# Altium PCB Gecko3Power.PCBDOC
Units mm, origin at the board's own origin, x right, y up, seen from the top; angles counter-clockwise.
Board outline 83.5 x 52 mm, 4 copper layers (Top Layer, MidLayer1, MidLayer2, Bottom Layer); 111 components, 73 nets, 456 pads, 142 vias.
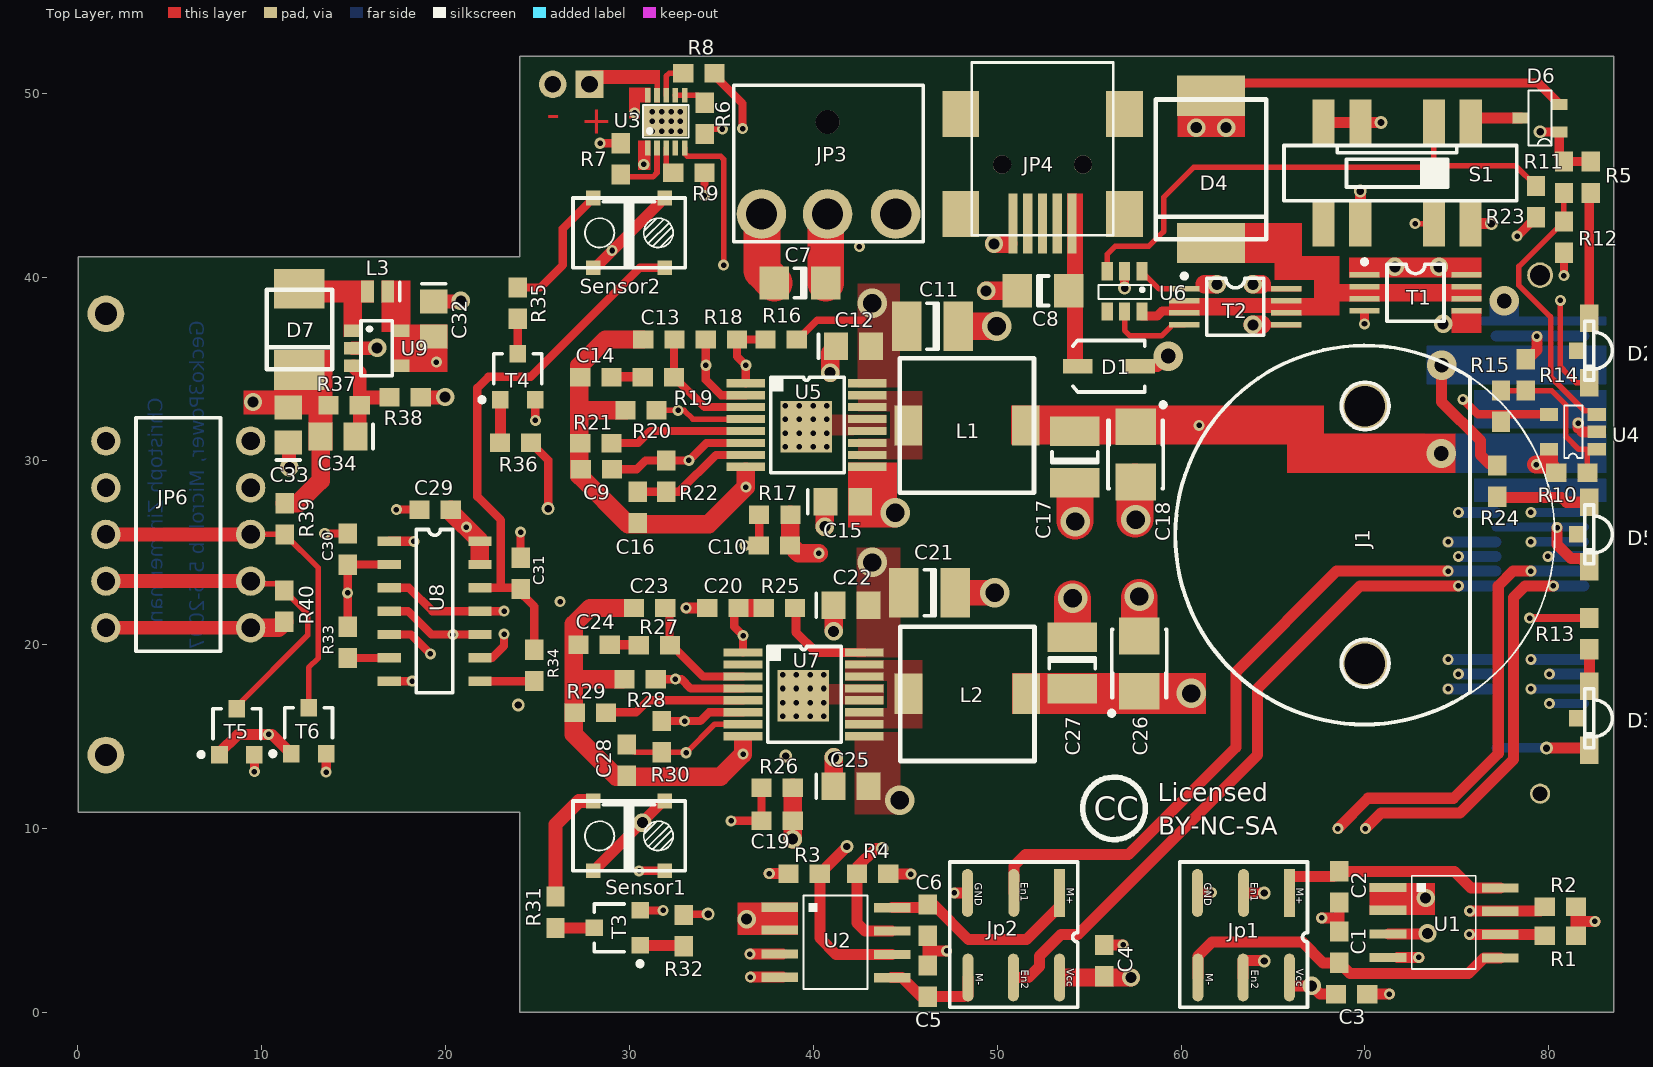
[diagram p0: Top Layer view]
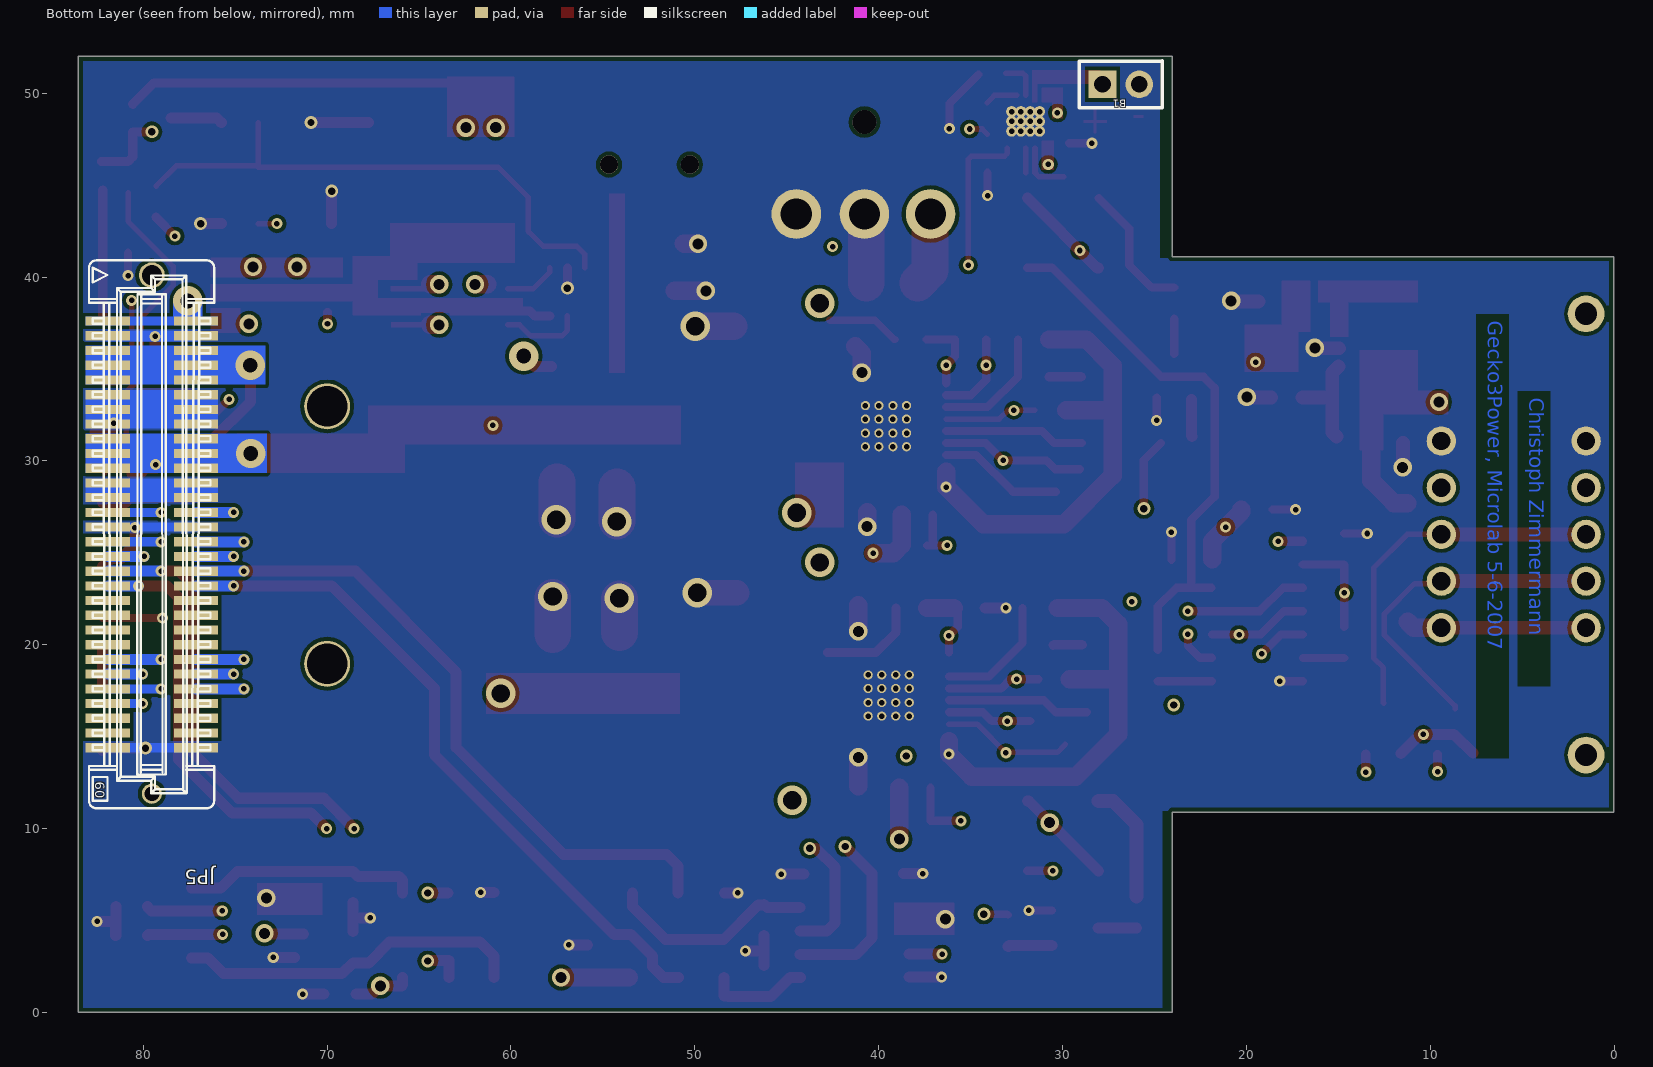
[diagram p1: Bottom Layer view, seen from below]
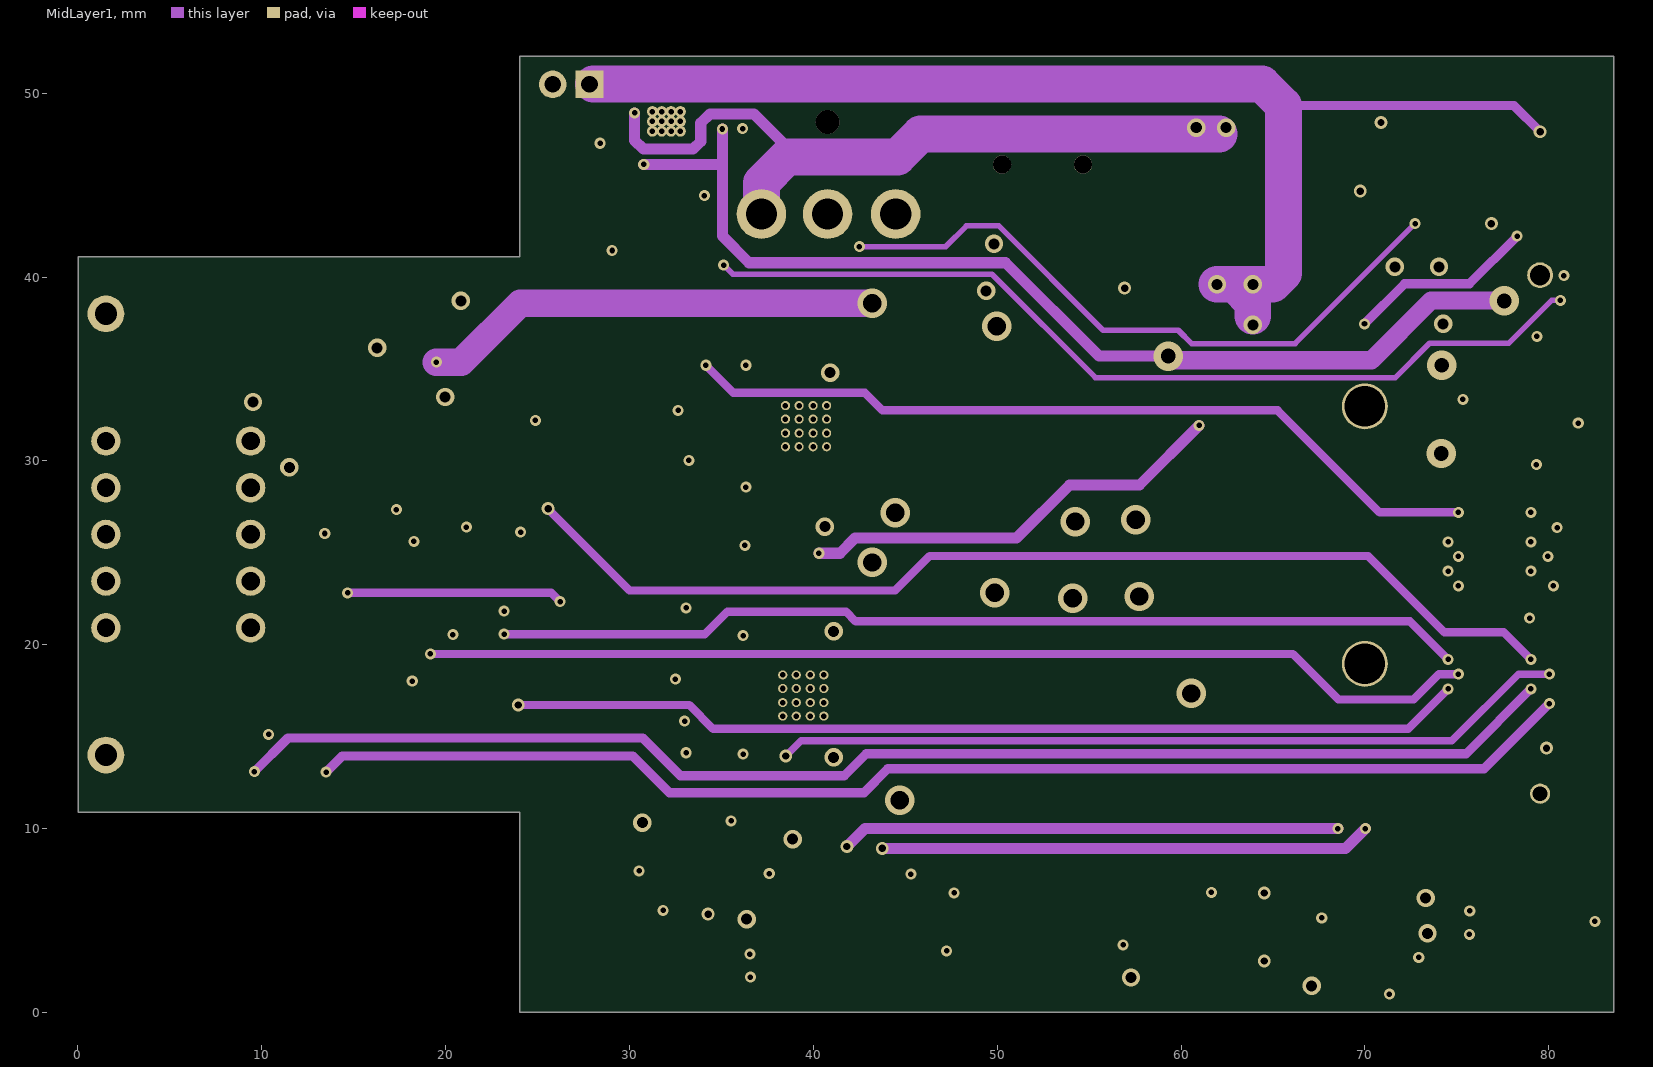
[diagram p2: MidLayer1]
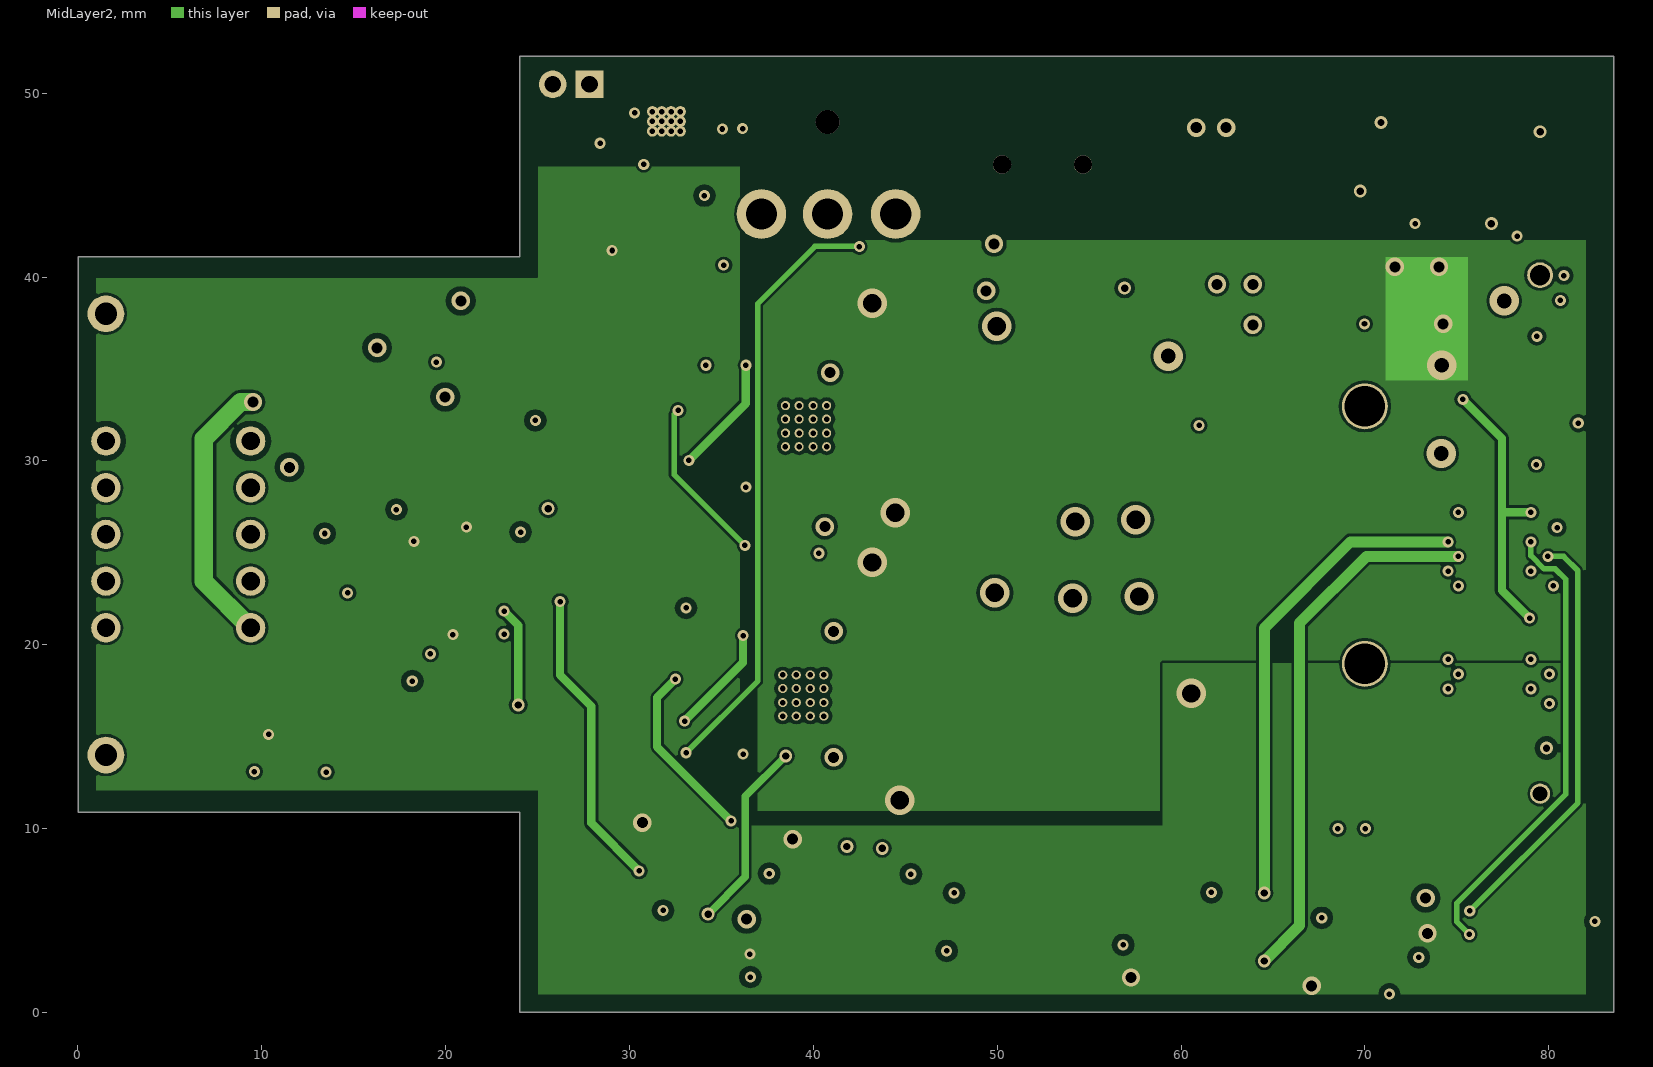
[diagram p3: MidLayer2]

## Layer stack, top to bottom
Top Layer: signal copper 0.0356
Dielectric: core 0.32, FR-4, Dk 4.8
MidLayer1: signal copper 0.0356
Dielectric: prepreg 0.32, FR-4, Dk 4.8
MidLayer2: signal copper 0.0356
Dielectric: core 0.32, FR-4, Dk 4.8
Bottom Layer: signal copper 0.0356

## Board outline
0.025,10.9 0.025,41.1 24.025,41.1 24.025,52 83.525,52 83.525,0 24.025,0 24.025,10.9

## Design rules (kind name [scope] priority, off if disabled: settings)
Clearance Clearance_1 [InNet('GND') vs Not(InNet('GND'))] p1: gap=0.2
Clearance [All] p2: gap=0.15
ComponentClearance BottomComponentClearance [OnLayer('Bottom Layer') vs OnLayer('Bottom Layer')] p1: gap=0.254 collisioncheckmode=3 verticalgap=0.254
ComponentClearance TopComponentClearance [OnLayer('Top Layer') vs OnLayer('Top Layer')] p2: gap=0.254 collisioncheckmode=0 verticalgap=0.254
HoleSize [All] p1: absolutevalues=TRUE maxlimit=2.54 minlimit=0.3 maxpercent=80.000 minpercent=20.000
PasteMaskExpansion [All] p1: expansion=-0.05
PlaneClearance [All] p1: clearance=1
PlaneConnect [All] p1: planeconnectstyle=Direct reliefexpansion=0.508 reliefentries=4 reliefconductorwidth=0.254 reliefairgap=0.254
PolygonConnect [All] p1: connectstyle=Direct reliefconductorwidth=0.2 reliefentries=4 polygonreliefangle="90 Angle"
RoomDefinition 2_Wheels_H_Bridge [InComponentClass('2_Wheels_H_Bridge')] p1: confinementstyle=ConfineIn formatcopy=TRUE lockcomponents=FALSE outline 36.805,-0.07 82.405,-0.07 82.405,8.605 36.805,8.605
RoomDefinition Battery_Charger [InComponentClass('Battery_Charger')] p2: confinementstyle=ConfineIn formatcopy=TRUE lockcomponents=FALSE outline 24.305,13.13 98.08,13.13 98.08,52.205 24.305,52.205
RoomDefinition Power_Supply [InComponentClass('Power_Supply')] p3: confinementstyle=ConfineIn formatcopy=TRUE lockcomponents=FALSE outline 26.305,9.555 125.83,9.555 125.83,66.88 26.305,66.88
RoomDefinition Gecko3Power [InComponentClass('Gecko3Power')] p4 off: confinementstyle=ConfineIn formatcopy=TRUE lockcomponents=FALSE outline -6.575,-6.15 94.825,-6.15 94.825,63.1 -6.575,63.1
RoomDefinition Ultrasonic [InComponentClass('Ultrasonic')] p5 off: confinementstyle=ConfineIn formatcopy=TRUE lockcomponents=FALSE outline -4.2,-5.125 28.225,-5.125 28.225,61.801 -4.2,61.801
RoomDefinition Sigma_Delta [InComponentClass('Sigma_Delta')] p6 off: confinementstyle=ConfineIn formatcopy=TRUE lockcomponents=FALSE outline 9.525,-1.7 35.975,-1.7 35.975,46.6 9.525,46.6
RoutingCorners [All] p1: cornerstyle=Round minsetback=2.54 maxsetback=2.54
RoutingLayers [All] p1: top layer_v5=TRUE mid layer 1_v5=FALSE mid layer 2_v5=FALSE bottom layer_v5=TRUE
RoutingVias [All] p1: holewidth=0.3 width=0.6 viastyle="Through Hole" minholewidth=0.3 minwidth=0.6 maxholewidth=1 maxwidth=2
SolderMaskExpansion [All] p1: expansion=0.05
TestPointUsage [All] p1: valid=0 allowmultiple=FALSE
Testpoint [All] p1: side=15 testpointundercomponent=TRUE minsize=1.016 maxsize=2.54 preferedsize=1.524 minholesize=0 maxholesize=1.016 preferedholesize=0.813 testpointgrid=0.025 style=1023 order=0123456789
Width [All] p1: maxlimit=10 minlimit=0.15 preferedwidth=0.6
12 further rules are at their usual default settings.

## Classes and differential pairs
component class Battery_Charger: B1 C7 C8 D1 D2 D3 JP3 JP4 R5 R6 R7 R8 R9 R10 R11 R12 R13 R14 R15 U3 U4
component class Gecko3Power: J1 JP5
component class 2_Wheels_H_Bridge: C1 C2 C3 C4 C5 C6 Jp1 Jp2 R1 R2 R3 R4 U1 U2
component class Power_Supply: C9 C10 C11 C12 C13 C14 C15 C16 C17 C18 C19 C20 C21 C22 C23 C24 C25 C26 C27 C28 D4 D5 D6 L1 L2 R16 R17 R18 R19 R20 R21 R22 R23 R24 R25 R26 R27 R28 R29 R30 S1 T1 T2 U5 U6 U7
component class Ultrasonic: C32 C33 C34 D7 JP6 L3 R37 R38 R39 R40 T5 T6 U9
component class Sigma_Delta: C29 C30 C31 R31 R32 R33 R34 R35 R36 Sensor1 Sensor2 T3 T4 U8

## Components (designator, comment, footprint, x,y, rotation, side; value= is the part's Value field where it differs from the comment)
B1 "New_Battery" Battery_new 27.825,50.475 r180 bottom locked
C1 "#NAME?" 1608[0603] 68.6,3.55 r270 top
C2 "#NAME?" 1608[0603] 68.6,6.825 r90 top
C3 "#NAME?" 1608[0603] 69.275,1 r180 top
C4 "#NAME?" 1608[0603] 55.825,2.825 r270 top
C5 "#NAME?" 1608[0603] 46.225,1.7 r270 top
C6 "#NAME?" 1608[0603] 46.225,5.025 r90 top
C7 "Cap Semi" C1206 39.275,39.675 r180 top
C8 "Cap Semi" C1206 52.5,39.25 r0 top
C9 "#NAME?" 1608[0603] 28.2,29.55 r0 top
C10 "#NAME?" 1608[0603] 37.875,25.4 r180 top
C11 "Cap Semi" C1210 46.475,37.325 r180 top
C12 "22uF" C0805 42.175,36.225 r0 top
C13 "#NAME?" 1608[0603] 31.6,36.6 r0 top
C14 "#NAME?" 1608[0603] 28.175,34.55 r0 top
C15 "22uF" C0805 41.6,27.775 r0 top
C16 "#NAME?" 1608[0603] 30.45,27.475 r90 top
C17 "Cap Semi" C1210 54.225,30.2 r90 top
C18 "T492B" B 57.525,30.35 r270 top
C19 "#NAME?" 1608[0603] 38.025,10.425 r180 top
C20 "#NAME?" 1608[0603] 35.075,22 r0 top
C21 "Cap Semi" C1210 46.325,22.825 r180 top
C22 "22uF" C0805 42.05,22.15 r0 top
C23 "#NAME?" 1608[0603] 31.1,22 r0 top
C24 "#NAME?" 1608[0603] 28.075,20 r0 top
C25 "22uF" C0805 42.05,12.3 r0 top
C26 "T492B" B 57.725,18.975 r90 top
C27 "Cap Semi" C1210 54.075,19 r270 top
C28 "#NAME?" 1608[0603] 29.85,13.725 r90 top
C29 "#NAME?" 1608[0603] 19.425,27.35 r0 top
C30 "#NAME?" 1608[0603] 14.675,25.2 r270 top
C31 "#NAME?" 1608[0603] 24.075,23.875 r270 top
C32 "4.7uF" C0805 19.35,37.725 r270 top
C33 "4.7uF" C0805 11.45,31.95 r90 top
C34 "4.7pF" C0805 14.15,31.325 r180 top
D1 "#NAME?" sod-123 56.075,35.15 r180 top
D2 "#NAME?" HSMC-C110 82.2,36 r90 top locked
D3 "#NAME?" HSMC-C110 82.2,16 r90 top locked
D4 "Schottky  Power Rectifier" MBRS340 61.625,45.85 r270 top
D5 "#NAME?" HSMC-C110 82.2,26 r90 top locked
D6 "#NAME?" BAT54C 79.65,49.875 r180 top
D7 "10BQ030" MBRS1100T3-D 12.05,37.15 r270 top
J1 "fi" Roue 70,25.975 r0 top locked
Jp1 "#NAME?" "New connector" 63.4,4.2 r270 top
Jp2 "#NAME?" "New connector" 50.9,4.2 r270 top
JP3 "MINI POWER JACK" "Mini power Jack" 40.775,43.425 r90 top locked
JP4 "USB-MINIB-SMT" USB_MINI_B_SMD 54.065,42.917 r270 top locked
JP5 "AMP-FH-60-RECEPTABLE-H9-H13" amp_FH_.8mm_60pin_r_H9_H13 79.525,26 r270 bottom
JP6 "M20-7890546" M20-7890546 5.46,26 r0 top locked
L1 "#NAME?" B82472G4222M 48.35,31.925 r0 top
L2 "#NAME?" B82472G4222M 48.375,17.325 r0 top
L3 "#NAME?" CAPC1210L 16.3,39.2 r180 top
R1 "#NAME?" 1608[0603] 80.625,4.175 r180 top
R2 "#NAME?" 1608[0603] 80.625,5.75 r180 top
R3 "#NAME?" 1608[0603] 39.5,7.55 r0 top
R4 "#NAME?" 1608[0603] 43.225,7.55 r180 top
R5 "#NAME?" 1608[0603] 82.275,45.425 r90 top
R6 "#NAME?" 1608[0603] 34.1,48.625 r90 top
R7 "#NAME?" 1608[0603] 29.525,46.425 r90 top
R8 "#NAME?" 1608[0603] 33.775,51.075 r180 top
R9 "#NAME?" 1608[0603] 33.225,45.675 r180 top
R10 "#NAME?" 1608[0603] 81.25,29.35 r180 top
R11 "#NAME?" 1608[0603] 80.825,45.425 r90 top
R12 "#NAME?" 1608[0603] 80.825,42.175 r90 top
R13 "#NAME?" 1608[0603] 82.2,20.6 r90 top
R14 "#NAME?" 1608[0603] 78.75,34.675 r270 top
R15 "#NAME?" 1608[0603] 77.4,32.975 r90 top
R16 "#NAME?" 1608[0603] 38.25,36.6 r180 top
R17 "#NAME?" 1608[0603] 37.9,27.075 r180 top
R18 "#NAME?" 1608[0603] 35,36.6 r0 top
R19 "#NAME?" 1608[0603] 31.575,34.55 r0 top
R20 "#NAME?" 1608[0603] 30.625,32.75 r0 top
R21 "#NAME?" 1608[0603] 28.175,30.95 r0 top
R22 "#NAME?" 1608[0603] 32,29.175 r90 top
R23 "#NAME?" 1608[0603] 79.3,44.1 r270 top
R24 "#NAME?" 1608[0603] 77.2,28.9 r90 top
R25 "#NAME?" 1608[0603] 38.15,22 r180 top
R26 "#NAME?" 1608[0603] 38.025,12.225 r180 top
R27 "#NAME?" 1608[0603] 31.35,19.975 r0 top
R28 "#NAME?" 1608[0603] 30.575,18.125 r0 top
R29 "#NAME?" 1608[0603] 27.875,16.3 r0 top
R30 "#NAME?" 1608[0603] 31.75,15 r90 top
R31 "#NAME?" 1608[0603] 25.975,5.45 r90 top
R32 "#NAME?" 1608[0603] 32.95,4.45 r270 top
R33 "#NAME?" 1608[0603] 14.675,20.125 r90 top
R34 "#NAME?" 1608[0603] 24.825,18.875 r90 top
R35 "#NAME?" 1608[0603] 23.925,38.575 r270 top
R36 "#NAME?" 1608[0603] 23.8,30.975 r180 top
R37 "#NAME?" 1608[0603] 14.475,33.025 r180 top
R38 "#NAME?" 1608[0603] 17.8,33.45 r180 top
R39 "#NAME?" 1608[0603] 11.25,26.85 r90 top
R40 "#NAME?" 1608[0603] 11.225,22.1 r270 top
S1 "#NAME?" switch_mms238t 71.75,45.65 r180 top
Sensor1 "TCND5000" TCND5000 29.975,9.6 r0 top locked
Sensor2 "TCND5000" TCND5000 29.975,42.4 r0 top locked
T1 "IRF7705" TSSOP-8 72.75,39.15 r270 top
T2 "IRF7705" TSSOP-8 62.95,38.375 r270 top
T3 "BSS670" SOT-23 29.325,4.6 r90 top
T4 "BSS670" SOT-23 23.925,34.575 r0 top
T5 "BSS670" SOT-23 8.65,15.275 r0 top
T6 "BSS670" SOT-23 12.55,15.325 r0 top
U1 "Si9986" Si9986 71.25,6.8 r0 top
U2 "Si9986" SI9986 38.175,5.725 r0 top
U3 "LTC4075EDD" LTC4075 33.15,47.65 r90 top
U4 "LMV321" LMV331 82.15,31.85 r180 top
U5 "LTC3412" LCT3412A_New 36.325,34.225 r0 top locked
U6 "LTC4412" MAX5467 57.275,40.575 r270 top
U7 "LTC3412" LCT3412A_New 36.175,19.575 r0 top locked
U8 "74HC74" SO-G14 19.4,21.825 r0 top
U9 "LM2703" LM2703 16.25,36.125 r0 top
? "CC License" CC-License 56.3,11.125 r0 top

## Footprints (in the part's own frame and the unit in brackets; to place one, negate y for a bottom-side part, rotate by r counter-clockwise, add the part's x,y. Pads: shape width x height; smd on the part's side, far side on the other; paste and mask are expansions set on the pad)
1608[0603] [mm] "Chip Capacitor; Body 1.6 x 0.8 mm (LxW typ)"
  rect 1.1x1 smd: 1(-0.85,0) 2(0.85,0)
amp_FH_.8mm_60pin_r_H9_H13 [mm] "Height System, 0.8mm, 60 Pin, 9 or 13mm Heigth, Receptacle"
  round 1.4 hole 1.1: 0(-14.1,0)
  round 1.1 hole 0.8: 0(14.1,0)
  rect 0.5x2.4 smd: 1(-11.6,-2.4) 2(-11.6,2.4) 3(-10.8,-2.4) 4(-10.8,2.4) 5(-10,-2.4) 6(-10,2.4) 7(-9.2,-2.4) 8(-9.2,2.4) 9(-8.4,-2.4) 10(-8.4,2.4) 11(-7.6,-2.4) 12(-7.6,2.4) 13(-6.8,-2.4) 14(-6.8,2.4) 15(-6,-2.4) 16(-6,2.4) 17(-5.2,-2.4) 18(-5.2,2.4) 19(-4.4,-2.4) 20(-4.4,2.4) 21(-3.6,-2.4) 22(-3.6,2.4) 23(-2.8,-2.4) 24(-2.8,2.4) 25(-2,-2.4) 26(-2,2.4) 27(-1.2,-2.4) 28(-1.2,2.4) 29(-0.4,-2.4) 30(-0.4,2.4) 31(0.4,-2.4) 32(0.4,2.4) 33(1.2,-2.4) 34(1.2,2.4) 35(2,-2.4) 36(2,2.4) 37(2.8,-2.4) 38(2.8,2.4) 39(3.6,-2.4) 40(3.6,2.4) 41(4.4,-2.4) 42(4.4,2.4) 43(5.2,-2.4) 44(5.2,2.4) 45(6,-2.4) 46(6,2.4) 47(6.8,-2.4) 48(6.8,2.4) 49(7.6,-2.4) 50(7.6,2.4) 51(8.4,-2.4) 52(8.4,2.4) 53(9.2,-2.4) 54(9.2,2.4) 55(10,-2.4) 56(10,2.4) 57(10.8,-2.4) 58(10.8,2.4) 59(11.6,-2.4) 60(11.6,2.4)
  silkscreen extent -14.91,-3.42 14.89,3.38
B [mm] "Capacitor, SM Tantalum; Body 3.5 x 2.8 mm (LxW typ)"
  rect 2x2.2 smd: 1(-1.5,0) 2(1.5,0)
  silkscreen extent -2.82,-1.5 1.85,1.63
B82472G4222M [mm]
  rect 1.5x2.2 smd: 1(-3.2,0) 2(3.2,0)
  silkscreen extent -3.65,-3.65 3.65,3.65
BAT54C [mm] "BAT54C"
  rect 0.9x0.6 smd: 1(-0.914,1.981) 2(-0.914,0.481) 3(1.168,1.219)
  silkscreen extent -0.5,-0.27 0.75,2.73
Battery_new [mm]
  rect 1.5x1.5 hole 0.9: 1(0,0)
  round 1.5 hole 0.9: 2(2,0)
  silkscreen extent -1.27,-1.27 3.25,1.27
C0805 [mm] "Chip Capacitor; Body 2.0 x 1.2 mm (LxW typ)"
  rect 1.3x1.5 smd: 1(-0.95,0) 2(0.95,0)
  silkscreen extent -1.9,-0.65 -1.9,0.65
C1206 [mm] "Chip Capacitor; Body 3.2 x 1.6 mm (LxW typ)"
  rect 1.6x1.8 smd: 1(-1.4,0) 2(1.4,0)
  silkscreen extent -0.3,-0.8 0.3,0.8
C1210 [mm] "Chip Capacitor; Body 3.2 x 2.5 mm (LxW typ)"
  rect 1.6x2.7 smd: 1(-1.4,0) 2(1.4,0)
  silkscreen extent -0.3,-1.25 0.3,1.25
CAPC1210L [mm] "Chip Capacitor, Body 1.2x1.0mm, IPC High Density"
  rect 0.7x1.2 smd: 1(-0.55,0) 2(0.55,0)
  silkscreen extent -1.2,-0.5 -1.2,0.5, body extent -0.66,-0.64 0.66,0.64, height 1.02
CC-License [mm]
  silkscreen extent -1.65,-1.73 1.75,1.68
HSMC-C110 [mm]
  rect 1.5x1 smd: 1(-1.75,0) 2(1.75,0)
  rect 0.9x0.9 smd: 3(0,0.65)
  silkscreen extent -1.6,-1.25 1.6,0.25
LCT3412A_New [mm]
  rect 2.1x0.45 smd: 1(0,0) 2(0,-0.65) 3(0,-1.3) 4(0,-1.95) 5(0,-2.6) 6(0,-3.25) 7(0,-3.9) 8(0,-4.55) 9(6.6,-4.55) 10(6.6,-3.9) 11(6.6,-3.25) 12(6.6,-2.6) 13(6.6,-1.95) 14(6.6,-1.3) 15(6.6,-0.65) 16(6.6,0)
  round 0.5 hole 0.3: 17(2.159,-3.454) 17(2.159,-2.718) 17(2.159,-1.956) 17(2.159,-1.219) 17(2.896,-3.454) 17(2.896,-2.718) 17(2.896,-1.956) 17(2.896,-1.219) 17(3.658,-3.454) 17(3.658,-2.718) 17(3.658,-1.956) 17(3.658,-1.219) 17(4.394,-3.454) 17(4.394,-2.718) 17(4.394,-1.956) 17(4.394,-1.219)
  rect 2.8x2.8 smd paste-0.4: 17(3.277,-2.362)
  silkscreen extent 1.35,-4.88 5.35,0.33
LM2703 [mm]
  rect 0.99x0.69 smd: 1(-1.295,0.95) 2(-1.295,0) 3(-1.295,-0.95) 4(1.295,-0.95) 5(1.295,0.95)
  silkscreen extent -0.85,-1.5 0.85,1.5
LMV331 [mm]
  rect 1x0.7 smd: 1(-0.457,1.219) 2(-0.457,0.269) 3(-0.457,-0.681) 4(2.143,-0.681) 5(2.143,1.219)
  silkscreen extent 0.32,-1.16 1.31,1.69
LTC4075 [mm]
  rect 0.8x0.3 smd: 1(-0.635,2.154) 2(-0.635,1.654) 3(-0.635,1.154) 4(-0.635,0.654) 5(-0.635,0.152) 6(2.243,0.154) 7(2.243,0.66) 8(2.243,1.154) 9(2.243,1.654) 10(2.243,2.154)
  round 0.6 hole 0.3: 11(0.279,1.905) 11(0.279,1.397) 11(0.279,0.381) 11(0.279,0.889) 11(0.813,0.889) 11(0.813,1.397) 11(0.813,1.905) 11(0.813,0.381) 11(1.346,1.905) 11(1.346,0.381) 11(1.346,0.889) 11(1.346,1.397)
  rect 1.65x2.36 smd paste-0.3: 11(0.813,1.168)
  silkscreen extent -0.08,-0.08 1.7,2.41
M20-7890546 [mm]
  round 1.6 hole 1: 1(-3.935,5.08) 1(3.935,5.08) 2(-3.935,2.54) 2(3.935,2.54) 3(-3.935,0) 3(3.935,0) 4(-3.935,-2.54) 4(3.935,-2.54) 5(-3.935,-5.08) 5(3.935,-5.08)
  silkscreen extent -2.3,-6.35 2.3,6.35
MAX5467 [mm] "MAX5467"
  rect 1x0.6 smd: 1(0.254,0.61) 2(0.254,-0.34) 3(0.254,-1.29) 4(2.454,-1.29) 5(2.454,-0.34) 6(2.454,0.61)
  silkscreen extent 1.02,-1.77 1.77,1.08
MBRS340 [mm]
  rect 2.2x3.7 smd: 1(-4,0) 2(4,0)
  silkscreen extent -3.8,-3 3.8,3
MBRS1100T3-D [mm]
  rect 2.159x2.743 smd: 1(-2.21,0) 2(2.21,0)
  silkscreen extent -2.16,-1.78 2.16,1.78
"Mini power Jack" [mm] "J"
  round 2.7 hole 1.7: 1(0,3.6) 2(0,0) 3(0,-3.7)
  round 1.3 hole 1.3: ""(5,0)
  silkscreen extent -1.5,-5.2 7,5.1
"New connector" [mm]
  rect 2.6x0.6 smd: 1(-2.3,2.489)
  oval 2.6x0.6 smd: 2(2.3,2.489) 3(-2.3,0) 4(2.3,-0.025) 5(-2.3,-2.515) 6(2.3,-2.489)
  silkscreen extent -3.99,-3.48 3.91,3.48
Roue [mm]
  round 2.5 hole 2.2: 0(0,6.985) 1(0,-7.01)
  silkscreen extent -10.31,-10.3 5.74,10.3
Si9986 [mm]
  rect 2x0.5 smd: 1(0,0) 2(0,-1.245) 3(0,-2.54) 4(0,-3.81) 5(6.113,-3.835) 6(6.113,-2.565) 7(6.113,-1.295) 8(6.113,-0.025)
  silkscreen extent 1.3,-4.44 4.78,0.64
SI9986 [mm]
  rect 2x0.5 smd: 1(0,0) 2(0,-1.245) 3(0,-2.54) 4(0,-3.81) 5(6.113,-3.835) 6(6.113,-2.565) 7(6.113,-1.295) 8(6.113,-0.025)
  silkscreen extent 1.3,-4.44 4.78,0.64
SO-G14 [mm]
  rect 1.27x0.51 smd: 1(-2.465,3.81) 2(-2.465,2.54) 3(-2.465,1.27) 4(-2.465,0) 5(-2.465,-1.27) 6(-2.465,-2.54) 7(-2.465,-3.81) 8(2.465,-3.81) 9(2.465,-2.54) 10(2.465,-1.27) 11(2.465,0) 12(2.465,1.27) 13(2.465,2.54) 14(2.465,3.81)
  silkscreen extent -0.99,-4.44 1,4.44
sod-123 [mm] "SOD-123; 2 Leads; Body 2.7 x 1.6 mm, (LxW)"
  rect 1.6x0.8 smd: 1(-1.7,0) 2(1.7,0)
  silkscreen extent -1.95,-1.4 1.95,1.4
SOT-23 [mm] "SOT-23; 3 Leads; Body 3.0 x 2.6 mm, inc. leads (LxW max)"
  rect 0.9x0.95 smd: 1(-0.95,-1.25) 2(0.95,-1.25) 3(0,1.25)
  silkscreen extent -2.07,-1.38 1.3,1.25
switch_mms238t [mm]
  rect 1.2x2.5 smd: 1(-4.005,-2.747) 2(-2.005,-2.747) 3(1.995,-2.747) 4(3.995,-2.747) 5(4.005,2.747) 6(2.005,2.747) 7(-1.995,2.747) 8(-3.995,2.747)
  silkscreen extent -6.5,-1.5 6.15,1.5
TCND5000 [mm]
  rect 0.8x0.8 smd: 1(-1.94,-1.9) 2(1.94,-1.9) 3(1.94,1.9) 4(-1.94,1.9)
  silkscreen extent -3.05,-1.9 3.05,1.9
TSSOP-8 [mm] "Shrink Small Outline; 8 Leads; Body Width 4.4 mm; Pitch 0.65 mm"
  rect 0.3x1.65 smd: 1(-0.975,-2.775) 2(-0.325,-2.775) 3(0.325,-2.775) 4(0.975,-2.775) 5(0.975,2.775) 6(0.325,2.775) 7(-0.325,2.775) 8(-0.975,2.775)
  silkscreen extent -1.8,-2.9 1.55,1.55
USB_MINI_B_SMD [mm]
  rect 3.25x0.5 smd: D+(0,-1.6) D-(0,-0.8) GND(0,-3.2) ID(0,-2.4) Vbus(0,0)
  rect 2.5x2 smd: shield(-5.95,2.85) shield(-5.95,-6.05) shield(-0.5,2.85) shield(-0.5,-6.05)
  round 1 hole 1: ""(-3.2,0.6) ""(-3.2,-3.8)
  silkscreen extent -8.75,-5.45 0.65,2.25

## Part data
B1: library part BATTERY_NEW
C1 C2 C3 C4 C5 C6 C9 C10 C12 C13 C14 C15 C16 C19 C20 C22 C23 C24 C25 C28 C29 C30 C31: library part CAP, "Capacitor"
C7 C8 C11 C17 C21 C27: "Capacitor (Semiconductor SIM Model)"
C18 C26: "Solid Tantalum Chip Capacitor, T492 Series - CWR11 Style Per Mil-PRF-55365/8"
C32 C33 C34: library part Cap, "Capacitor"
D1: library part SCHOTTKY_MBR05*
D2 D3 D5: library part LED-HSM*-C110, "LED"
D4: library part shottky-mbrs340tr
D6: library part BAT54C
D7: library part "D Schottky", "Schottky Diode"
J1: library part ROUE
Jp1 Jp2: library part "NEW CONNECTOR"
JP3: "Mini Power Jack"
JP5: "AMP Free Height System, 0.8mm, 60 Pin, 9 or 13mm Height, Receptable"
L1 L2: library part COIL-DR-SERIE, "DR Series Coils from Coiltronics"
L3: library part COIL-LQH, "Inductance"
R1 R2 R3 R4 R5 R6 R7 R8 R9 R10 R11 R12 R13 R14 R15 R16 R17 R18 R19 R20 R21 R22 R23 R24 R25 R26 R27 R28 R29 R30 R31 R32 R33 R34 R35 R36 R37 R38 R39 R40: library part RES, "Resistance"
S1: library part switch-mms238T
T1 T2: "HEXFET Power MOSFET"
T3 T4 T5 T6: library part MOSFET-N
U3: library part LTC4075
U4: "Op. Amp."
U5 U7: library part LTC3412A_NEW

## Free pads (board coordinates)
  round 2 hole 1.2: 0(1.525,38) 0(1.525,14)

## Via types
v1: diameter 0.6, hole 0.3, Top Layer to Bottom Layer, tented both sides, 87 vias
v2: diameter 1, hole 0.6, Top Layer to Bottom Layer, tented both sides, 26 vias
v3: diameter 0.7, hole 0.4, Top Layer to Bottom Layer, tented both sides, 14 vias
v4: diameter 1.6, hole 1, Top Layer to Bottom Layer, tented both sides, 11 vias
v5: diameter 1.6, hole 0.8, Top Layer to Bottom Layer, tented both sides, 4 vias

## Nets (pads, with @x,y where several pads share a name; then routed paths per layer and width w, separated by ;. In a path a pad name is that pad's centre, name@x,y a point inside that pad or via, vN(x,y) a via of type N, cw(c..) or ccw(c..) an arc to the next point about the centre after c; other vN are vias at no path point)
5V_80MA: C33.2 C34.2 D7.2 JP6.5 R37.2 R39.2 R40.2 | length 30.3
  Top Layer w0.75: JP6.5@1.525,20.92 JP6.5@9.395,20.92
  Top Layer w1: JP6.5@9.395,20.92 10.895,20.92 R40.2 ; R39.2 11.975,27.7 13.2,28.925 C34.2@13.2,31.55
  MidLayer2 w1: JP6.5@9.375,20.92 6.85,23.445 6.85,31.2 8.85,33.2 v2(9.525,33.2)
  Bottom Layer w0.5: JP6.5@1.525,20.92 JP6.5@2.08,20.92
DCIN: C7.2 D4.1 D6.2 JP3.1 U3.10 | length 62.4
  Top Layer w0.5: D4.1@63.1,50.25 63.4,50.55 79.425,50.55 80.564,49.411 D6.2
  Top Layer w2: JP3.1 37.2,43.4 37.2,40.35 C7.2
  MidLayer1 w0.6: v1(30.275,48.925) 30.275,47.425 30.75,46.95 33.45,46.95 33.875,47.375 33.875,48.375 34.375,48.875 36.775,48.875 38.925,46.725
  MidLayer1 w2: JP3.1@37.175,43.43 37.175,45.125 38.575,46.525 44.575,46.525 45.83,47.78 62.075,47.78
  other v2: 60.825,48.125 62.45,48.125
ENA1: Jp1.3 JP5.32 | length 30
  Top Layer w0.6: Jp1.3@63.425,6.5 v3(64.525,6.5)
  MidLayer2 w0.6: v3(64.525,6.5) 64.525,20.9 69.225,25.6 v1(74.525,25.6)
  Bottom Layer w0.6: v1(74.525,25.6) JP5.32
ENA2: Jp1.4 JP5.34 | length 33.4
  Top Layer w0.6: Jp1.4@63.375,1.9 63.375,2.825 v3@64.525,2.825
  MidLayer2 w0.6: v3(64.525,2.8) 66.45,4.725 66.45,21.175 70.075,24.8 v1(75.075,24.8)
  Bottom Layer w0.6: v1(75.075,24.8) JP5.34
ENB1: Jp2.3 JP5.36 | length 36.7
  Top Layer w0.6: Jp2.3 50.9,7.975 51.525,8.6 57.15,8.6 62.975,14.425 62.975,18.525 68.45,24 v1(74.525,24)
  Bottom Layer w0.6: v1(74.525,24) JP5.36
ENB2: Jp2.4 JP5.38 | length 37.5
  Top Layer w0.6: Jp2.4 51.7,1.9 52.3,2.5 52.3,3.075 53.475,4.25 54.4,4.25 64.15,14 64.15,17.625 69.725,23.2 v1(75.075,23.2)
  Bottom Layer w0.6: v1(75.075,23.2) JP5.38
GND: B1.2 C1.1 C2.1 C3.1 C4.1 C5.1 C6.1 C7.1 C8.1 C9.1 C11.1 C12.1 C13.1 C14.1 C15.1 C16.1 C17.1 C18.2 C20.1 C21.1 C22.1 C23.1 C24.1 C25.1 C26.2 C27.1 C28.1 C29.1 C30.1 C31.1 C32.1 C33.1 D3.1 D5.1 Jp1.5 Jp2.5 JP3.2 JP3.3 JP4.GND JP5.3 JP5.4 JP5.11 JP5.12 JP5.13 JP5.14 JP5.15 JP5.16 JP5.23 JP5.24 JP5.25 JP5.26 JP5.29 JP5.30 JP5.59 JP5.60 JP6.1 R1.1 R2.1 R3.1 R4.1 R7.2 R8.1 R9.1 R12.1 R14.1 R20.1 R21.1 R28.1 R29.1 R38.1 S1.3 S1.4 S1.6 S1.8 T3.2 T4.2 U1.1 U1.2 U1.4 U2.1 U2.2 U2.4 U3.11 U4.2 U5.8 U5.12 U5.13 U5.17 U6.2 U7.8 U7.12 U7.13 U7.17 U8.7 U9.2 | length 141.3
  Top Layer w0.45: v1(13.425,26.05) C30.1 ; U8.7 v1(18.185,18.015) ; v1(17.325,27.35) C29.1 ; C31.1@24.075,24.625 v1(24.075,26.125) ; v1(24.875,32.2) T4.2@24.875,33.45 ; v1(28.4,47.275) R7.2@29.65,47.275 ; T3.2 v1(31.825,5.55) ; v1(34.075,44.425) R9.1 ; R8.1@34.569,51.019 36.15,49.437 v1(36.15,48.075) ; v1(80.825,40.075) R12.1
  Top Layer w0.5: v3(56.928,39.397) U6.2@56.928,40.497
  Top Layer w0.6: v1(33.075,22) C20.1 ; v1(36.575,1.925) U2.4@38.36,1.925 ; v1(37.6,7.55) R3.1 ; R4.1@44.05,7.525 v1(45.3,7.525) ; C5.1 46.225,3.35 ; C6.1 46.225,3.35 ; v1(47.25,3.35) 46.225,3.35 ; v1@47.75,6.5 Jp2.5 ; C4.1 v1(56.85,3.675) ; Jp1.5@60.915,6.525 v1@61.55,6.525 ; v1(67.65,5.15) 68.6,5.15 C2.1 C1.1 ; S1.4 70.872,48.397 v3(70.875,48.4) ; S1.6 v3(69.745,44.67) ; C3.1@70.165,1 v1(71.325,1) ; U1.4@71.765,3 v1(72.925,3) ; S1.8 76.872,42.903 v3(76.875,42.9) ; R14.1@78.725,35.525 78.85,35.525 79.35,36.025 v1(79.35,36.775) ; v3(79.875,14.375) 82.075,14.375 D3.1 ; v1(80.45,26.375) 80.45,25.45 81.2,24.7 81.75,24.7 D5.1 ; R2.1 R1.1 81.5,4.2 81.5,4.95 v1(82.5,4.95) ; v1(81.6,32.05) 81.6,31.8 81.819,31.581 U4.2
  Top Layer w0.75: v2@11.475,29.65 C33.1@11.475,30.97 ; U9.2 16.275,36.125 v2(16.275,36.15) ; R38.1@18.655,33.45 v2@19.975,33.45 ; C32.1@19.33,38.675 v2@20.825,38.675
  Top Layer w1: 27,18.125 R28.1@29.6,18.125 ; 27.275,32.75 R20.1@29.8,32.75 ; C23.1 27.85,22 26.975,21.125 26.975,15.125 29.275,12.825 34.95,12.825 v1(36.175,14.05) 36.175,14.75 ; C13.1@30.725,36.6 28.7,36.6 27.275,35.175 27.275,29.2 29.925,26.55 34.3,26.55 v1(36.325,28.575) 36.325,29.4 ; v2(40.625,26.425) C15.1@40.625,27.2 ; v2(40.909,34.802) 40.909,35.859 C12.1@41.275,36.225 ; C25.1 v2(41.1,13.875) ; v2@41.1,20.775 C22.1 ; v2(49.4,39.25) C8.1 ; v2(49.825,41.8) 50.575,41.8 50.6,41.825
  Top Layer w1.4: C21.1 v4(49.875,22.825)
  Top Layer w1.5: C11.1 v4(49.975,37.325)
  Top Layer w2: C7.1 40.675,43.325 JP3.2 ; C27.1@54.1,20.65 v4@54.1,22.5 ; v4@54.225,26.725 C17.1@54.225,28.575 ; v4@57.5,26.825 C18.2@57.5,28.85 ; C26.2@57.725,20.55 v4@57.725,22.575
  Bottom Layer w0.5: JP5.60 JP5.59 ; JP5.30 JP5.29
  Bottom Layer w0.6: JP5.4 JP5.3
  other v1: 47.65,6.5 61.65,6.525
  other v2: 36.367,5.075 73.3,6.225 41.1,20.725 11.5,29.65 19.975,33.475 20.825,38.7
  other v4: 54.1,22.525 57.725,22.625 54.25,26.7 57.525,26.8
LINESENSORCLK: JP5.52 U8.3 U8.11 | length 66.8
  Top Layer w0.45: U8.3 18.005,23.095 19.275,21.825 v1(23.175,21.825)
  MidLayer1 w0.45: v3(23.95,16.725) 33.25,16.725 34.55,15.425 72.35,15.425 v1(74.525,17.6)
  MidLayer2 w0.45: v1(23.175,21.825) 23.95,21.05 v3(23.95,16.725)
  Bottom Layer w0.6: v1(74.525,17.6) JP5.52
LINESENSORIN1: JP5.47 R36.1 | length 65.3
  Top Layer w0.45: R36.1 25.575,30.05 v3(25.575,27.4)
  MidLayer1 w0.45: v3@25.575,27.425 25.575,27.375 30,22.95 44.45,22.95 46.325,24.825 70.175,24.825 74.325,20.675 77.55,20.675 v1(79.025,19.2)
  Bottom Layer w0.6: v1(79.025,19.2) JP5.47
LINESENSORIN2: JP5.49 R32.1 | length 57
  Top Layer w0.4: R32.1 33,5.35 v3(34.275,5.35)
  MidLayer1 w0.4: v3(38.5,13.95) 39.325,14.775 74.725,14.775 78.35,18.4 v1(80.025,18.4)
  MidLayer2 w0.4: v3(34.275,5.35) 36.3,7.375 36.3,11.75 v3(38.5,13.95)
  Bottom Layer w0.6: v1(80.025,18.4) JP5.49
LINESENSOROUT1: JP5.48 U8.9 | length 57.8
  Top Layer w0.45: U8.9 22.535,19.285 23.175,19.925 v1(23.175,20.575)
  MidLayer1 w0.45: v1(23.175,20.575) 34.1,20.575 35.325,21.8 41.775,21.8 42.304,21.271 72.454,21.271 v1(74.525,19.2)
  Bottom Layer w0.6: v1(74.525,19.2) JP5.48
LINESENSOROUT2: JP5.50 U8.5 | length 62.2
  Top Layer w0.45: U8.5 18.12,20.555 v1(19.175,19.5)
  MidLayer1 w0.45: v1(19.175,19.5) 20.2,19.5 66.075,19.5 68.55,17.025 72.65,17.025 74.025,18.4 v1(75.075,18.4)
  Bottom Layer w0.6: v1(75.075,18.4) JP5.50
LOWBATTERY: JP5.27 R13.2 R15.1 U4.4 | length 27.3
  Top Layer w0.45: v1(75.325,33.35) 76.144,32.531 77.375,32.531 77.4,32.506 R15.1 ; R15.1@77.4,32.531 U4.4 ; v1(78.95,21.45) R13.2
  MidLayer2 w0.45: v1(75.325,33.35) 77.45,31.225 77.45,27.2 ; v1(78.95,21.45) 77.45,22.95 77.45,27.2 ; v1(79.025,27.2) 78.25,27.2 ; 77.45,27.2 78.25,27.2 ; 77.45,27.2 78.25,27.2
  Bottom Layer w0.5: v1(79.025,27.2) JP5.27
MA+: C2.2 Jp1.1 U1.8 | length 12.8
  Top Layer w0.6: Jp1.1 65.889,7.214 66.075,7.4 68.325,7.4 C2.2 74.875,7.675 75.775,6.775 U1.8
MA-: C1.2 Jp1.6 U1.5 | length 19
  Top Layer w0.6: Jp1.6 60.911,3.061 61.675,3.825 66.6,3.825 67.725,2.7 C1.2 69.175,2.125 75.625,2.125 76.465,2.965 U1.5
MB+: C6.2 Jp2.1 U2.8 | length 11.5
  Top Layer w0.6: U2.8 46.05,5.7 C6.2 ; C6.2@46.2,5.85 46.55,5.85 48.425,3.975 51.6,3.975 53.389,5.764 Jp2.1
MB-: C5.2 Jp2.6 U2.5 | length 5.6
  Top Layer w0.6: U2.5@44.25,1.9 44.825,1.9 45.85,0.875 48.2,0.875 48.411,0.886 Jp2.6
NetC8_2: C8.2 D1.2 JP4.Vbus
NetC9_2: C9.2 R16.2 R18.2 R22.2 U5.1 U5.6 | length 18.4
  Top Layer w0.45: C9.2 30.4,29.55 30.875,30.025 v1(33.225,30.025) 34.175,30.975 U5.6 ; U5.1 v1(36.325,35.2) 35.85,35.675 R18.2 R16.2
  MidLayer2 w0.45: v1(33.225,30.025) 36.325,33.125 v1(36.325,35.2)
NetC10_2: C10.2 R17.2 R20.2 U5.4 | length 16.8
  Top Layer w0.3: R20.2@31.5,32.75 32.975,32.75 33.45,32.275 U5.4
  Top Layer w0.45: v1(36.275,25.4) C10.2@37.35,25.4 ; C10.2 37.05,25.425 R17.2
  MidLayer2 w0.3: v1(32.65,32.75) 32.425,32.525 32.425,29.25 v1(36.275,25.4)
NetC13_2: C13.2 R19.2 U5.3 | length 6.6
  Top Layer w0.45: C13.2@32.425,36.6 32.425,34.575 34.075,32.925 U5.3
NetC14_2: C14.2 R19.1 | length 1.8
  Top Layer w0.5: C14.2@28.975,34.575 R19.1@30.725,34.575
NetC16_2: C16.2 R22.1 U5.7 | length 6.8
  Top Layer w0.45: C16.2@30.35,28.325 31.75,28.325 32.7,28.325 34.7,30.325 U5.7
NetC19_2: C19.2 R26.2 R28.2 U7.4 | length 18.2
  Top Layer w0.45: R28.2@31.3,18.125 32.825,18.125 33.325,17.625 U7.4 ; v1(35.525,10.425) C19.2 ; C19.2@37.175,10.5 R26.2
  MidLayer2 w0.45: v1(32.5,18.125) 31.5,17.125 31.5,14.45 v1(35.525,10.425)
NetC20_2: C20.2 R25.2 R30.2 U7.1 U7.6 | length 14.4
  Top Layer w0.45: R30.2 33.85,15.85 34.325,16.325 U7.6 ; C20.2@35.7,21.775 35.7,20.975 v1(36.175,20.5) U7.1
  Top Layer w1: C20.2 R25.2@37.35,22
  MidLayer2 w0.45: v1(33,15.85) 36.175,19.025 v1(36.175,20.5)
NetC23_2: C23.2 R27.2 U7.3 | length 6.7
  Top Layer w0.45: C23.2@32.175,22 32.175,20.1 34,18.275 U7.3
NetC24_2: C24.2 R27.1 | length 1.6
  Top Layer w0.5: C24.2 30.475,20 R27.1
NetC28_2: C28.2 R30.1 S1.7 U7.7 | length 77
  Top Layer w0.3: C28.2 30.275,14.15 R30.1 33.1,14.15 34.625,15.675 U7.7 ; v1(72.725,42.9) 72.728,42.903 S1.7
  MidLayer1 w0.3: v1(42.5,41.65) 47.2,41.65 48.325,42.775 50.085,42.775 55.755,37.105 59.845,37.105 60.575,36.375 66.2,36.375 v1(72.725,42.9)
  MidLayer2 w0.3: v1(33.075,14.125) 36.98,18.03 36.98,38.555 40.087,41.662 v1@42.488,41.662
NetC30_2: C30.2 R33.2 Sensor1.2 U8.2 | length 35.2
  Top Layer w0.45: R33.2 C30.2 ; C30.2@14.69,24.365 U8.2 ; v1(30.525,7.7) Sensor1.2
  MidLayer1 w0.45: v1(14.675,22.825) 25.75,22.825 v1(26.225,22.35)
  MidLayer2 w0.45: v1(26.225,22.35) 26.225,18.35 27.925,16.65 27.925,10.3 v1(30.525,7.7)
NetC31_2: C31.2 R34.2 Sensor2.2 U8.12 | length 30
  Top Layer w0.45: U8.12@21.9,23.095 23.805,23.095 24.825,22.075 R34.2 ; 23,23.095 23,26.775 21.725,28.05 21.725,33.975 22.325,34.575 24.625,34.575 30.55,40.5 Sensor2.2 ; 23.17,23.095 23.175,23.1
NetC34_1: C34.1 R37.1 R38.2 U9.3 | length 5.7
  Top Layer w0.75: U9.3@14.99,35.14 15.325,34.805 15.325,31.55 C34.1 ; R37.1@15.325,33.35 15.425,33.45 R38.2
NetD2_1: D2.1 U3.5 | length 63.6
  Top Layer w0.3: U3.5 32.998,46.727 33.15,46.575 34.95,46.575 35.125,46.4 v1(35.125,40.65) ; v1(80.625,38.725) 80.625,35.125 80.75,35 ; 80.775,34.975 81.5,34.25 D2.1
  MidLayer1 w0.3: v1(35.125,40.65) 35.625,40.15 49.71,40.15 55.335,34.525 71.65,34.525 73.525,36.4 77.825,36.4 80.15,38.725 v1(80.625,38.725)
NetD2_2: D2.2 R5.1 | length 7
  Top Layer w0.5: D2.2 R5.1@82.2,44.725
NetD3_2: D3.2 R13.1 | length 2
  Top Layer w0.6: D3.2 R13.1
NetD4_2: D4.2 T1.2 T1.3 T1.6 T1.7 T2.2 T2.3 T2.6 T2.7 U6.6 | length 2.1
  Top Layer w0.5: U6.6@57.875,37.88 58.705,37.88 58.975,38.15 T2.3@59.85,38.15
NetD5_2: D5.2 R24.1 | length 5.1
  Top Layer w0.6: R24.1@77.2,28 80.7,28 80.95,27.75 D5.2
NetD6_3: D6.3 S1.1 | length 2.8
  Top Layer w0.6: S1.1 76.013,48.656 D6.3
NetD7_1: D7.1 L3.2 U9.1
NetJP6_3: JP6.3 R39.1 T6.3 | length 20.9
  Top Layer w0.3: JP6.3@9.35,26 R39.1 13.075,24.175 13.075,19.275 12.55,18.75 12.55,16.85 T6.3@12.525,16.825
  Top Layer w0.75: JP6.3@1.525,26 JP6.3@9.35,26
  MidLayer1 w0.75: JP6.3@9.395,25.98 JP6.3@9.395,26
  Bottom Layer w0.6: JP6.3@1.525,26 JP6.3@2.029,26 ; JP6.3@8.891,26 JP6.3@9.395,26
NetJP6_4: JP6.4 R40.1 T5.3 | length 19
  Top Layer w0.3: T5.3 8.65,16.675 12.5,20.525 12.5,21.675 10.85,23.325 9.53,23.325 JP6.4@9.395,23.46
  Top Layer w0.75: JP6.4@1.525,23.46 JP6.4@9.415,23.46
  Bottom Layer w0.6: JP6.4@1.525,23.46 JP6.4@2.029,23.46
NetL1_1: L1.1 U5.10 U5.11 U5.14 U5.15
NetL2_1: L2.1 U7.10 U7.11 U7.14 U7.15
NetR6_2: R6.2 U3.6 U3.7 | length 1.8
  Top Layer w0.3: U3.7@32.49,49.885 33.004,49.885 33.014,49.875 33.7,49.875 R6.2
NetR7_1: R7.1 U3.2 | length 3
  Top Layer w0.3: R7.1@29.925,45.45 31.275,45.45 31.496,45.671 U3.2
NetR8_2: R8.2 U3.8 | length 2.2
  Top Layer w0.3: U3.8 31.996,50.921 32.15,51.075 R8.2@33.075,51.075
NetR9_2: R9.2 U3.3 | length 1.3
  Top Layer w0.3: U3.3 32,47.011 R9.2@32,45.675
NetR10_1: R10.1 R14.2 R15.2 U4.1 | length 8.8
  Top Layer w0.3: R15.2@77.425,33.825 80.15,33.825 80.925,33.05 80.925,31.325 81.619,30.631 U4.1 ; R10.1 82.1,30.6
NetR11_1: R11.1 R12.2 U4.3 | length 15.1
  Top Layer w0.3: R11.1 R12.2 78.375,40.575 78.375,39.55 80.1,37.825 80.1,34.575 81.95,32.725 82.225,32.725 82.419,32.531 U4.3
NetR21_2: R21.2 U5.5 | length 7.6
  Top Layer w0.45: R21.2@28.95,30.975 30.475,30.975 31.125,31.625 U5.5
NetR23_1: R23.1 S1.2 U6.3 | length 30.1
  Top Layer w0.3: U6.3@55.975,40.5 55.975,41.225 56.425,41.675 58.25,41.675 59.05,42.475 59.05,44.325 60.7,45.975 64.375,45.975 ; 64.3,45.975 73.755,45.975 S1.2 ; 73.675,46.05 78.2,46.05 R23.1
NetR23_2: R23.2 T1.4 | length 12.4
  Top Layer w0.5: v1(69.975,37.45) T1.4@69.975,38.075 ; v1(78.275,42.225) R23.2
  MidLayer1 w0.5: v1(69.975,37.45) 72.156,39.631 75.681,39.631 v1(78.275,42.225)
NetR29_2: R29.2 U7.5 | length 7.8
  Top Layer w0.45: R29.2@28.675,16.325 30.35,16.325 31,16.975 U7.5
NetR31_1: R31.1 T3.3 | length 2.1
  Top Layer w0.6: R31.1 T3.3
NetR31_2: R31.2 Sensor1.4 | length 6.5
  Top Layer w0.75: R31.2 25.975,10.225 27.25,11.5 Sensor1.4
NetR32_2: R32.2 T3.1 | length 2.4
  Top Layer w0.6: T3.1 32.9,3.65 R32.2
NetR33_1: R33.1 U8.6 | length 2.3
  Top Layer w0.45: R33.1 U8.6@16.925,19.275
NetR34_1: R34.1 U8.8 | length 2.9
  Top Layer w0.45: U8.8 R34.1@24.815,18.015
NetR35_1: R35.1 Sensor2.4 | length 7.3
  Top Layer w0.45: R35.1 25.15,39.425 26.375,40.65 26.375,42.64 Sensor2.4
NetR35_2: R35.2 T4.3 | length 1.9
  Top Layer w0.45: T4.3 R35.2
NetR36_2: R36.2 T4.1 | length 2
  Top Layer w0.6: R36.2@22.95,31.325 22.975,31.35 T4.1
NetT2_4: T2.4 U6.5 | length 4.4
  Top Layer w0.3: U6.5@56.925,37.88 56.925,37.1 57.225,36.8 58.925,36.8 59.525,37.4 T2.4
POWERGOOD: JP5.28 R18.1 U5.2 | length 51
  Top Layer w0.45: R18.1 34.15,34.4 34.975,33.575 U5.2
  MidLayer1 w0.45: v1(34.15,35.2) 35.65,33.7 42.813,33.7 43.763,32.75 65.25,32.75 70.8,27.2 v1(75.075,27.2)
  Bottom Layer w0.6: v1(75.075,27.2) JP5.28
PWMA1: JP5.31 R1.2 U1.6 | length 32.3
  Top Layer w0.6: v1(75.675,4.25) 77.46,4.25 77.475,4.235 79.715,4.235 R1.2
  MidLayer2 w0.3: v1(75.675,4.25) 75,4.925 75,5.95 80.925,11.875 80.925,23.55 80.35,24.125 79.75,24.125 79.025,24.85 v1(79.025,25.6)
  Bottom Layer w0.5: v1(79.025,25.6) JP5.31
PWMA2: JP5.33 R2.2 U1.7 | length 29
  Top Layer w0.6: v1(75.7,5.525) U1.7@77.25,5.525 ; U1.7@77.3,5.525 79.55,5.525 R2.2
  MidLayer2 w0.3: v1(75.7,5.525) 81.575,11.4 81.575,24.025 80.8,24.8 v1(79.95,24.8)
  Bottom Layer w0.6: v1(79.95,24.8) JP5.33
PWMB1: JP5.35 R3.2 U2.6 | length 61.6
  Top Layer w0.6: 41.65,3.15 41.66,3.16 ; v3(41.825,9.025) R3.2 40.35,4.05 41.24,3.16 U2.6 ; v1(68.525,10) 70.175,11.65 74.825,11.65 77.25,14.075 77.25,23.2 78.05,24 v1(79.025,24)
  MidLayer1 w0.6: v3(41.825,9.025) 42.8,10 v1(68.525,10)
  Bottom Layer w0.6: v1(79.025,24) JP5.35
PWMB2: JP5.37 R4.2 U2.7 | length 56.2
  Top Layer w0.6: v3(43.75,8.925) 43.4,8.925 42.375,7.9 42.375,4.875 42.82,4.43 U2.7 ; v1(70.025,10) 70.875,10.85 75.175,10.85 78.075,13.75 78.075,22.575 78.7,23.2 v1(80.25,23.2)
  MidLayer1 w0.6: v3(43.75,8.925) 68.95,8.925 v1(70.025,10)
  Bottom Layer w0.6: v1(80.25,23.2) JP5.37
SCL_EXT: JP5.53 T6.2 | length 72.6
  Top Layer w0.5: v1@13.509,13.084 T6.2@13.509,14.057
  MidLayer1 w0.5: v1(13.5,13.075) 14.375,13.95 30.175,13.95 32.175,11.95 42.75,11.95 44.05,13.25 76.475,13.25 v1(80.025,16.8)
  Bottom Layer w0.5: v1(80.025,16.8) JP5.53
SDA_EXT: JP5.51 T5.2 | length 76.8
  Top Layer w0.5: v1@9.6,13.15 T5.2
  MidLayer1 w0.5: v1(9.6,13.1) 11.425,14.925 30.725,14.925 32.775,12.875 41.675,12.875 42.875,14.075 75.5,14.075 v1(79.025,17.6)
  Bottom Layer w0.5: v1(79.025,17.6) JP5.51
VBAT: B1.1 D6.1 R5.2 R11.2 T2.1 T2.5 T2.8 U3.9 U6.1 | length 76.5
  Top Layer w0.3: U6.1@57.875,40.5 57.875,40.275 58.8,39.35 T2.1 ; v3@79.525,47.9 v3@79.531,47.894
  Top Layer w0.5: v3@79.531,47.894 D6.1 80.564,46.536 R11.2 R5.2
  Top Layer w1: 61.275,39.6 v2(61.95,39.6) ; v2(63.9,37.4) 64.4,37.4 ; v2(63.9,39.6) 64.4,39.6
  MidLayer1 w0.5: 65.575,49.325 78.1,49.325 v3@79.525,47.9
  MidLayer1 w2: B1.1@28.025,50.5 64.4,50.5 65.575,49.325 65.575,40.2 64.975,39.6 v2(61.95,39.6) ; 62.925,39.6 63.9,38.625 v2@63.9,37.875
  other v3: 79.528,47.897
VCC: C3.2 C4.2 C19.1 C26.1 C27.2 C29.2 Jp1.2 Jp2.2 L2.2 R26.1 Sensor1.1 Sensor1.3 Sensor2.1 Sensor2.3 T5.1 T6.1 U1.3 U2.3 U8.1 U8.4 U8.10 U8.13 U8.14 | length 39.4
  Top Layer w0.45: U8.4 17.95,21.825 19.22,20.555 U8.10@21.875,20.555
  Top Layer w0.5: U8.1@16.945,25.625 v1(18.275,25.625)
  Top Layer w0.6: T5.1@7.675,14.1 8.7,15.125 10.55,15.125 T6.1 ; Sensor1.1 31.835,11.5 Sensor1.3 ; Sensor2.1 28.115,40.5 Sensor2.3 ; v1(36.55,3.175) U2.3@38.335,3.175 ; Jp1.2 65.889,1.486 65.925,1.45 v2(67.1,1.45) 67.55,1 C3.2 ; U1.3@71.275,4.265 v2@73.375,4.275
  Top Layer w1: C29.2 20.275,27.225 U8.14 21.865,24.65 ; v2(38.875,9.425) C19.1 R26.1 ; Jp2.2@53.595,1.9 v2(57.275,1.9)
  other v1: 10.375,15.125 20.4,20.55 21.125,26.4 29.057,41.442
  other v2: 73.4,4.3 30.7,10.325
  other v4: 60.55,17.35
VCC3V3: C10.1 C17.2 C18.1 JP5.17 JP5.18 JP5.19 JP5.20 JP5.21 JP5.22 L1.2 R10.2 R17.1 U4.5 | length 28.9
  Top Layer w1: R17.1 38.75,25.425 39.2,24.975 v1(40.3,24.975) ; v1(79.325,29.8) 79.95,29.8 R10.2 ; R10.2@80.007,29.807 U4.5@80.007,30.475
  MidLayer1 w0.6: v1(40.3,24.975) 41.45,24.975 42.275,25.8 51.05,25.8 53.925,28.675 57.725,28.675 v1(60.975,31.925)
  other v5: 74.15,30.4
VOUT: C11.2 C12.2 C15.2 C21.2 C22.2 C25.2 C32.2 JP5.5 JP5.6 JP5.7 JP5.8 JP5.9 JP5.10 L3.1 R16.1 R24.2 R25.1 T1.1 T1.5 T1.8 U5.9 U5.16 U7.9 U7.16 U9.4 U9.5 | length 41.4
  Top Layer w0.4: R16.1 39.15,36.6 40.2,37.65 42.65,37.65
  Top Layer w0.5: R25.1@39.05,22 39.05,20.675 40.15,19.575 U7.16
  Top Layer w0.6: v5(74.175,35.2) 74.175,33.2 76.275,31.1 76.275,30.325 76.775,29.825 R24.2@77.2,29.825
  MidLayer1 w1.5: v1(19.5,35.375) 20.85,35.375 24.05,38.575 v4(43.2,38.575)
  other v2: 74.25,37.45 71.625,40.55 74.025,40.55
  other v4: 44.7,11.55 43.2,24.475 44.45,27.175
VUSB: D1.1 JP5.1 JP5.2 R6.1 U3.1 | length 59.6
  Top Layer w0.3: R6.1 34.375,48.05 v1(35.05,48.05)
  Top Layer w0.6: D1.1@57.8,35.125 58.725,35.125 v5@59.275,35.675
  MidLayer1 w0.6: v1(30.775,46.125) 35.05,46.125 ; v1(35.05,48.05) 35.05,42.225 36.5,40.775 50.45,40.775 55.525,35.7 v5(59.3,35.7)
  MidLayer1 w1: v5(59.3,35.7) 59.525,35.475 70.35,35.475 73.6,38.725 77.5,38.725 v5(77.575,38.7) ; v5@59.4,35.875 v5@59.419,35.85
pads on no net: D2.3 D3.3 D5.3 J1.0 J1.1 JP3. JP4. JP4.D+ JP4.D- JP4.ID JP4.shield JP5.0 JP5.39 JP5.40 JP5.41 JP5.42 JP5.43 JP5.44 JP5.45 JP5.46 JP5.54 JP5.55 JP5.56 JP5.57 JP5.58 JP6.2 S1.5 U3.4 U6.4 U7.2

## Polygon pours and split planes (outlines as drawn)
GND on Top Layer "Top Layer-GND 5" (solid, remove dead copper, pour order 1008): 43.825,16.75 39.452,16.75 39.452,17.825 39.485,17.85 43.825,17.85
GND on Top Layer "Top Layer-GND 4" (solid, remove dead copper, pour order 1007): 43.975,32.5 39.6,32.5 39.6,31.425 39.634,31.4 43.975,31.4
NetL2_1 on Top Layer "Top Layer-NetL3_1" (solid, remove dead copper, pour order 1006): 41.74,15.45 41.725,15.475 41.725,19.15 45.925,19.15 45.925,15.45
NetL1_1 on Top Layer "Top Layer-NetL2_1" (solid, remove dead copper, pour order 1005): 42.45,33.8 45.925,33.8 45.925,30.125 45.905,30.1 42.45,30.1
VOUT on Top Layer "In1" (solid, remove dead copper, pour order 1002): 44.7,33.95 44.683,34 42.425,34 42.425,39.625 44.7,39.625
VOUT on Top Layer "SharedIn" (solid, remove dead copper, pour order 1003): 44.725,25.275 42.35,25.275 42.35,19.325 44.725,19.325
VOUT on Top Layer "In2" (solid, remove dead copper, pour order 1004): 42.25,15.25 44.725,15.25 44.725,10.775 42.25,10.775
VOUT on MidLayer2 "MidLayer2-VOUT" (solid, remove dead copper, pour order 1001): 36.975,42 82,42 82,10.975 36.975,10.975
VCC on MidLayer2 "MidLayer2-VCC" (solid, remove dead copper, pour order 1000): 1,39.925 1,12.025 1.05,12.075 25.025,12.075 25.025,1 82,1 82,19.1 81.9,19 59,19 59,10.15 36,10.15 36,46 25.025,46 25.025,39.975 24.975,39.925
GND on Bottom Layer "Bottom Layer-GND" (solid, remove dead copper, pour order 1009): -0.4,41.025 24.7,41.025 24.7,52.925 84.5,52.925 84.5,-0.825 24.575,-0.825 24.575,10.975 -0.425,10.975

## Other copper
Top Layer:
  rectangle net VOUT: 74.7,36.95 76.35,38.325
  rectangle net NetD4_2: 63.35,38.05 65.175,38.85
  rectangle net NetD4_2: 59.35,37.9 63.35,38.85
  rectangle net NetD4_2: 67.225,37.9 68.625,41.15
  rectangle net NetD4_2: 65.075,39.825 68.625,41.15
  rectangle net NetD4_2: 59.775,40.75 66.575,42.95
  rectangle net NetD4_2: 64.9,37.9 68.2,38.85
  rectangle net NetD4_2: 67.25,38.675 76.35,39.625
  rectangle net VBAT: 63.525,39.2 66.55,39.5
  rectangle net VOUT: 69.125,39.975 76.35,41.05
  rectangle net VCC: 50.8,16.225 61.35,18.475
  rectangle net VOUT: 41.875,26.375 44.55,29.9
  rectangle net GND: 70.25,5.3 73.8,7.05
  rectangle net GND: 35.875,4.225 39.175,5.975
  rectangle net NetC8_2: 53.8,34.775 54.675,44.55
  rectangle net VUSB: 30.475,45.825 31.15,47.425
  rectangle net VBAT: 27.925,50.5 31.65,51.25
  rectangle net VBAT: 31.35,49.5 31.65,51.25
  rectangle net DCIN: 29.975,48.625 30.575,50.3
  rectangle net DCIN: 29.975,49.5 31.15,50.3
  rectangle net VBAT: 63.5,37.25 66.525,37.55
  rectangle net DCIN: 59.8,47.625 63.475,50.9
  rectangle net VCC3V3: 65.75,29.35 74.925,31.475
  rectangle net VCC3V3: 50.75,30.9 67.775,33.025
  rectangle net 5V_80MA: 9,32.525 10.675,33.825
  rectangle net NetD7_1: 14.45,36.725 15.45,39.8
  rectangle net 5V_80MA: 12.55,30.575 13.85,33.35
  rectangle net VOUT: 16.5,37 18.1,39.8
  rectangle net NetD7_1: 10.675,38.6 16.1,39.8
  rectangle net 5V_80MA: 10.675,32.525 13.85,36.025
  rectangle net VOUT: 17.175,34.825 20.1,37.425
  text "-" at 26.225,49.3 h1.5 r180
  text "+" at 27.35,47.8 h1.5
MidLayer2:
  rectangle net VOUT: 71.125,34.375 75.6,41.075
Bottom Layer:
  rectangle net VUSB: 76.775,37.35 78.375,38.725
  rectangle net VUSB: 75.925,37.35 83.125,37.85
  rectangle net GND: 75.925,27.75 83.125,29.05
  rectangle net VCC3V3: 73.275,29.35 83.125,31.475
  rectangle net GND: 75.925,31.75 83.125,33.85
  rectangle net VOUT: 73.35,34.15 83.125,36.275
  text "Gecko3Power, Microlab 5-6-2007" at 6.875,37.625 h0.8 r90
  text "Christoph Zimmermann" at 4.625,33.425 h0.8 r90

## Silkscreen, mask and mechanical layers (free items; w line width, h text height)
Top Overlay:
  circle w0.1: c69.975,25.95 r10.35
Mechanical 1:
  the board outline again, w0.1
Mechanical 2:
  lines w0.2: 68.75,23 75.35,23 73.575,24.325 ; 73.575,21.725 75.252,23.073
  lines w0.4: 76.4,36.05 78.125,36.05 78.125,16 76.425,16 76.425,36.05
  text "Schlitz feilen" at 65.15,18.625 h1.5 r90
  text "in Unterlagsscheib" at 67.775,18.45 h1.5 r90

## Dimensions
70,18.965 to 77.2,28.05 on Mechanical 2
76.4,36.05 to 78.125,36.05 on Mechanical 2
0.025,10.9 to 0.025,41.1 on Mechanical 2
24.025,52 to 83.525,52 on Mechanical 2
24.025,52 to 0.025,41.1 on Mechanical 2
0.025,41.1 to 24.025,52 on Mechanical 2
0.025,10.9 to 24.025,0 on Mechanical 2
83.525,0 to 83.525,52 on Mechanical 2

## Text inside footprints (layer, text, board x,y; h text height)
Jp1: Top Overlay "Vcc" at 66.27,2.371 h0.4 r270; Top Overlay "En2" at 63.806,2.32 h0.4 r270; Top Overlay "M-" at 61.343,2.143 h0.4 r270; Top Overlay "GND" at 61.266,7.045 h0.4 r270; Top Overlay "En1" at 63.781,7.07 h0.4 r270; Top Overlay "M+" at 66.27,6.791 h0.4 r270
Jp2: Top Overlay "Vcc" at 53.77,2.371 h0.4 r270; Top Overlay "En2" at 51.306,2.32 h0.4 r270; Top Overlay "M-" at 48.843,2.143 h0.4 r270; Top Overlay "GND" at 48.766,7.045 h0.4 r270; Top Overlay "En1" at 51.281,7.07 h0.4 r270; Top Overlay "M+" at 53.77,6.791 h0.4 r270
JP5: Bottom Overlay "60" at 82.6,12.55 h0.52 r90
?: Top Overlay "BY-NC-SA" at 58.75,9.675 h1; Top Overlay "Licensed" at 58.725,11.5 h1; Top Overlay "CC" at 55.25,10.45 h1.3